# Altium PCB ATRACK_FACE_V1.PcbDoc
Units mm, origin at the board's own origin, x right, y up, seen from the top; angles counter-clockwise.
Board outline 155 x 42 mm, 2 copper layers (Top Layer, Bottom Layer); 51 components, 41 nets, 155 pads, 9 vias.
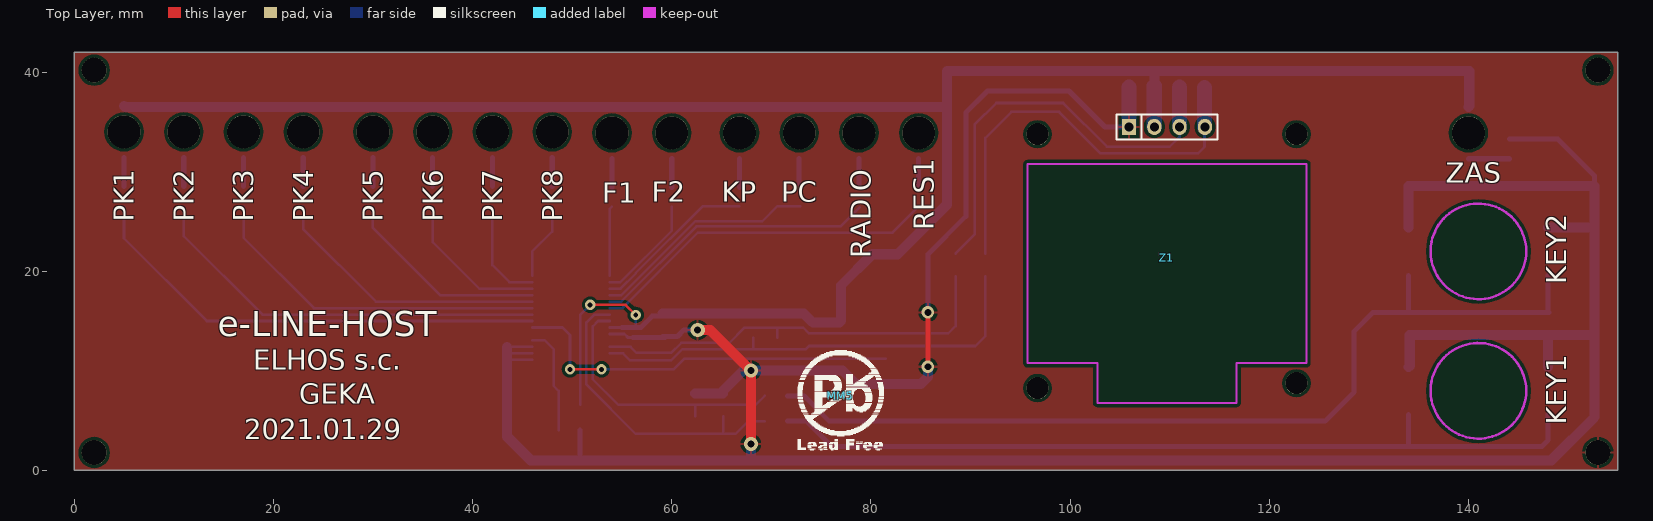
[diagram p0: Top Layer view]
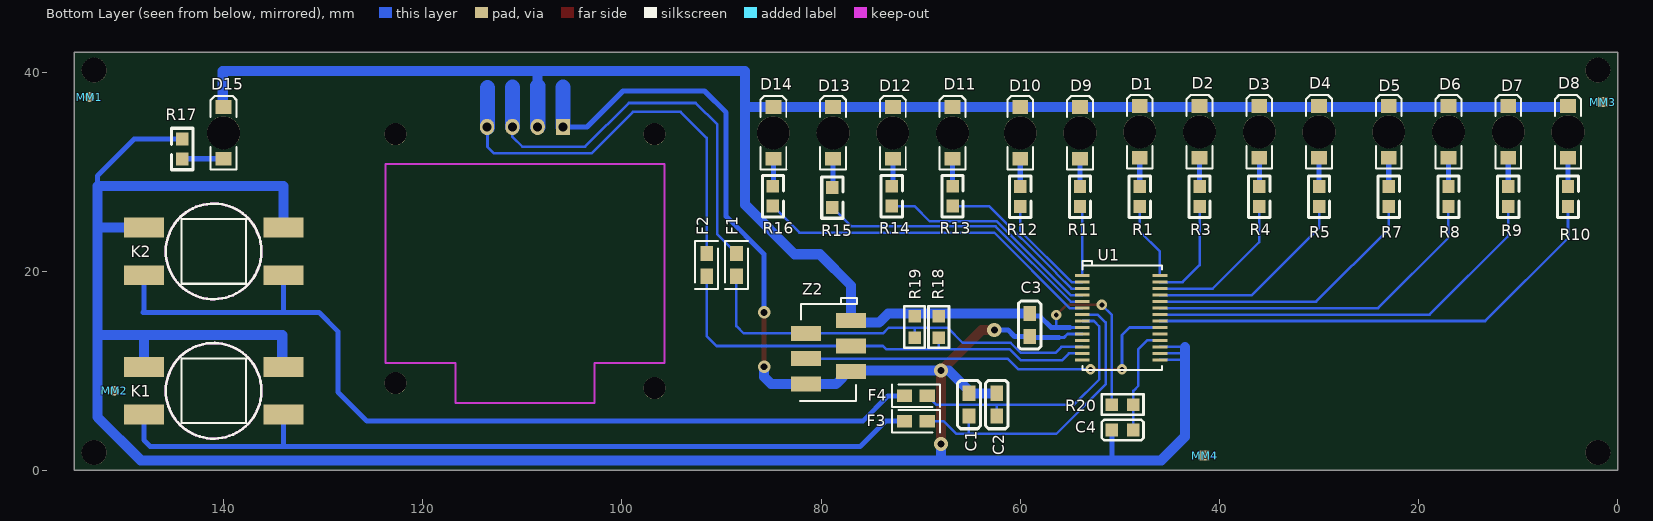
[diagram p1: Bottom Layer view, seen from below]

## Layer stack, top to bottom
Top Layer: signal copper 0.0356
Dielectric: dielectric 0.32, FR-4, Dk 4.8
Bottom Layer: signal copper 0.0356

## Board outline
0,0 0,42 155,42 155,0

## Design rules (kind name [scope] priority, off if disabled: settings)
Clearance Clearance_1 [InPolygon] p1: gap=0.305
Clearance [All] p2: gap=0.152
ComponentClearance [All] p1 off: gap=0.254 collisioncheckmode=3 verticalgap=0.254 showdistances=FALSE
HoleSize [All] p1: absolutevalues=TRUE maxlimit=5 minlimit=0.3 maxpercent=80.000 minpercent=20.000
MinimumSolderMaskSliver [All] p1: minsoldermaskwidth=0.102
PolygonConnect [All] p1: connectstyle=Relief reliefconductorwidth=0.254 reliefentries=4 polygonreliefangle="90 Angle"
RoutingVias [All] p1: holewidth=0.5 width=1.016 viastyle="Through Hole" minholewidth=0.3 minwidth=1.016 maxholewidth=2 maxwidth=5.08
SilkToSilkClearance [All] p1: silktosilkclearance=0.102
SilkscreenOverComponentPads [All] p1: minsilkscreentomaskgap=0.102
SolderMaskExpansion [All] p1: expansion=0.102
Width [All] p1: maxlimit=5.08 minlimit=0.254 preferedwidth=0.254 minimp=50.000000 maximp=50.000000 favimp=50.000000
23 further rules are at their usual default settings.

## Components (designator, comment, footprint, x,y, rotation, side; value= is the part's Value field where it differs from the comment)
C1 "10n" 0805C#1 65.151,5.461 r90 bottom
C2 "10n" 0805C#1 62.357,5.461 r90 bottom
C3 "100nF" 0805C#1 59.055,15.748 r270 bottom
C4 "100nF" 0805C#2 48.641,4.064 r0 bottom
D1 "KPTR-3216QBC-D" LED_LAMP_1 48,34 r270 bottom
D2 "KPTR-3216QBC-D" LED_LAMP_1 42,34 r270 bottom
D3 "KPTR-3216SURCK" LED_LAMP_1 36,34 r270 bottom
D4 "KPTR-3216SURCK" LED_LAMP_1 30,34 r270 bottom
D5 "KPTR-3216SURCK" LED_LAMP_1 23,34 r270 bottom
D6 "KPTR-3216SURCK" LED_LAMP_1 17,34 r270 bottom
D7 "KPTR-3216SURCK" LED_LAMP_1 11,34 r270 bottom
D8 "KPTR-3216SURCK" LED_LAMP_1 5,34 r270 bottom
D9 "KPTR-3216SURCK" LED_LAMP_1 54,33.9 r270 bottom
D10 "KPTR-3216SURCK" LED_LAMP_1 60,33.9 r270 bottom
D11 "KPTR-3216SURCK" LED_LAMP_1 66.8,33.9 r270 bottom
D12 "KPTR-3216SURCK" LED_LAMP_1 72.8,33.9 r270 bottom
D13 "KPTR-3216SURCK" LED_LAMP_1 78.8,33.9 r270 bottom
D14 "KPTR-3216SURCK" LED_LAMP_1 84.8,33.9 r270 bottom
D15 "KPTR-3216SURCK" LED_LAMP_1 140,33.9 r270 bottom
F1 "BLM18BB141SN1D" 0805L#1 88.5,19.5 r270 bottom
F2 "BLM18BB141SN1D" 0805L#1 91.5,19.5 r270 bottom
F3 "BLM18BB141SN1D" 0805L#2 71.628,4.953 r180 bottom
F4 "BLM18BB141SN1D" 0805L#2 71.628,7.493 r180 bottom
K1 "TACT-64KC" MK_DZ 141,8 r0 bottom locked
K2 "TACT-64KC" MK_DZ 141,22 r0 bottom locked
MM1 "" REF_CIR 153.5,37.5 r180 bottom
MM2 "" REF_CIR 151,8 r180 bottom
MM3 "" REF_SQR 1.5,37 r180 bottom
MM4 "" REF_SQR 41.5,1.5 r180 bottom
MM5 "" PB_FREE_GRAF 76.9,7.5 r0 top
R1 "1k" 0805R#1 48,26.375 r90 bottom
R3 "1k" 0805R#1 42,26.375 r90 bottom
R4 "1k" 0805R#1 36,26.375 r90 bottom
R5 "1k" 0805R#1 30,26.375 r90 bottom
R7 "1k" 0805R#1 23,26.375 r90 bottom
R8 "1k" 0805R#1 17,26.375 r90 bottom
R9 "1k" 0805R#1 11,26.375 r90 bottom
R10 "1k" 0805R#1 5,26.375 r90 bottom
R11 "1k" 0805R#1 54,26.375 r90 bottom
R12 "1k" 0805R#1 60,26.375 r90 bottom
R13 "1k" 0805R#1 66.802,26.418 r90 bottom
R14 "1k" 0805R#1 72.898,26.418 r90 bottom
R15 "1k" 0805R#1 78.867,26.291 r90 bottom
R16 "1k" 0805R#1 84.836,26.418 r90 bottom
R17 "1k" 0805R#1 144.145,33.399 r270 bottom
R18 "4k7" 0805R#2 68.199,15.494 r270 bottom
R19 "4k7" 0805R#2 70.612,15.494 r270 bottom
R20 "4k7" 0805R#2 50.8,6.604 r180 bottom
U1 "MCP23017-E/SS" SSOP28 53.774,19.558 r270 bottom
Z1 "WYSW" SSD1306_KW 109.73,35.77 r0 top locked
Z2 "Header 6" UMATCH-6SMD 77,15.04 r270 bottom

## Footprints (in the part's own frame and the unit in brackets; to place one, negate y for a bottom-side part, rotate by r counter-clockwise, add the part's x,y. Pads: shape width x height; smd on the part's side, far side on the other; paste and mask are expansions set on the pad)
0805C#1 [mil]
  rect 60x50 smd: 1(0,0) 2(90,0)
  silkscreen extent -50,-45 140,45
0805C#2 [mil]
  rect 50x50 smd: 1(0,0) 2(85,0)
  silkscreen extent -40,-40 125,41
0805L#1 [mil]
  rect 60x50 smd: 1(-90,0) 2(0,0)
  silkscreen extent -140,-45 50,45
0805L#2 [mil]
  rect 60x50 smd: 1(90,0) 2(0,0)
  silkscreen extent -50,-45 140,45
0805R#1 [mm]
  rect 1.3x1.25 smd: 1(0.125,0) 2(2.125,0)
  silkscreen extent -0.97,-1.07 3.2,1.07
0805R#2 [mm]
  rect 1.27x1.27 smd: 1(0,0) 2(2.159,0)
  silkscreen extent -1.02,-1.02 3.18,1.04
LED_LAMP_1 [mm]
  round 3.3 hole 3.3 unplated mask+0: 0(0,0)
  rect 1.4x1.6 smd: A(-2.6,0) K(2.6,0)
  silkscreen extent -3.7,-1.3 3.7,1.3
MK_DZ [mm]
  rect 4x2 smd: 1(-7,2.4) 2(7,2.4) 3(-7,-2.4) 4(7,-2.4)
  Keep-Out Layer circle w0.254: c0,0 r4.8
  silkscreen extent -4.8,-4.8 4.8,4.8
PB_FREE_GRAF [mm]
  silkscreen extent -4.29,-5.46 4.43,4.59
REF_CIR [mm]
  round 1 smd paste-0.5 mask+0.5: 0(0,0)
REF_SQR [mm]
  rect 1x1 smd paste-0.5 mask+0.5: ""(0,0)
SSD1306_KW [mm]
  round 2.2 hole 2.2 mask+0: 0(-13,-27.5) 0(-13,-2) 0(13,-27) 0(13,-2)
  rect 1.422x1.626 hole 0.9: 1(-3.81,-1.27)
  oval 1.422x1.626 hole 0.9: 2(-1.27,-1.27) 3(1.27,-1.27) 4(3.81,-1.27)
  silkscreen extent -5.08,-2.54 5.08,0
SSOP28 [mm]
  rect 0.3x1.5 smd: 1(0,0) 2(0.65,0) 3(1.3,0) 4(1.95,0) 5(2.6,0) 6(3.25,0) 7(3.9,0) 8(4.55,0) 9(5.2,0) 10(5.85,0) 11(6.5,0) 12(7.15,0) 13(7.8,0) 14(8.45,0) 15(8.45,7.8) 16(7.8,7.8) 17(7.15,7.8) 18(6.5,7.8) 19(5.85,7.8) 20(5.2,7.8) 21(4.55,7.8) 22(3.9,7.8) 23(3.25,7.8) 24(2.6,7.8) 25(1.95,7.8) 26(1.3,7.8) 27(0.65,7.8) 28(0,7.8)
  silkscreen extent -1.5,0 9.45,8
UMATCH-6SMD [mm]
  rect 1.5x3 smd: 1(0,0) 2(1.27,-4.5) 3(2.54,0) 4(3.81,-4.5) 5(5.08,0) 6(6.35,-4.5)
  silkscreen extent -2.3,-5.1 8.05,0.6

## Part data
C1 C2: library part CAP
C3 C4: library part CAP, "Capacitor"
D1 D2 D3 D10: library part LED
D4 D5 D6 D7 D8 D9 D11 D12 D13 D14 D15: library part LED, "KPTD-3216SGC"
F1 F2 F3 F4: library part KORALIK, "Koralik ferrytowy"
K1 K2: library part KLAW5
MM1 MM2 MM3 MM4 MM5: library part MECH
R1 R3 R4 R5 R7 R8 R9 R10 R11 R12 R13 R14 R15 R16 R17 R18 R19 R20: library part RES3
U1: library part MCP23017_SSOP28
Z1: library part CON4, "Connector"
Z2: "Micro Match 6"

## Free pads (board coordinates)
  round 2.5 hole 2.5 mask+0: 0(2,1.8) 0(2,40.2) 0(153,1.8) 0(153,40.2)

## Via types
v1: diameter 1.016, hole 0.5, Top Layer to Bottom Layer, tented both sides, 4 vias
v2: diameter 1.422, hole 0.7, Top Layer to Bottom Layer, tented both sides, 3 vias
v3: diameter 1.27, hole 0.7, Top Layer to Bottom Layer, tented both sides, 2 vias

## Nets (pads, with @x,y where several pads share a name; then routed paths per layer and width w, separated by ;. In a path a pad name is that pad's centre, name@x,y a point inside that pad or via, vN(x,y) a via of type N, cw(c..) or ccw(c..) an arc to the next point about the centre after c; other vN are vias at no path point)
GND: C1.2 C2.2 C3.2 C4.2 K1.3 K1.4 K2.3 K2.4 pad.0@153,1.8 R17.1 U1.10 U1.15 U1.16 U1.17 Z1.1 Z2.5 Z2.6 | length 322.7
  Top Layer w0.508: v3(85.725,10.414) v3(85.725,15.875)
  Top Layer w1.016: v2(62.611,14.097) 63.881,14.097 v2(67.945,10.033) v2(67.945,2.667)
  Bottom Layer w0.254: 43.218,12.065 43.472,11.811 43.525,11.758 U1.16 ; 43.472,11.176 43.54,11.108 U1.15 ; 43.472,12.408 U1.17 ; Z2.5 78.27,8.69 78.486,8.69
  Bottom Layer w0.305: U1.10 55.253,13.708 55.626,13.335 56.134,13.335
  Bottom Layer w0.508: 50.8,1.016 C4.2 ; 56.134,13.335 59.309,13.335 C3.2@59.436,13.462 ; C3.2 C3.2@59.436,13.462 ; v2(62.611,14.097) 61.214,14.097 60.579,13.462 C3.2@59.436,13.462 ; v3(85.725,15.875) 85.725,21.717 89.535,25.527 89.535,35.935 91.7,38.1 99.9,38.1 103.5,34.5 Z1.1 ; R17.1 148.971,33.274 152.654,29.591 152.654,28.575
  Bottom Layer w1.016: 43.472,12.408 43.472,11.811 43.472,11.176 43.472,3.391 45.847,1.016 50.8,1.016 67.945,1.016 ; C2.2 C1.2 65.151,8.001 67.183,10.033 v2(67.945,10.033) 77.143,10.033 78.486,8.69 Z2.6 85.017,8.69 85.725,9.398 v3(85.725,10.414) ; v2(67.945,2.667) 67.945,1.016 ; K1.3 134.112,10.512 134.112,13.589 148.082,13.589 ; K2.3 134,28.56 133.985,28.575 152.654,28.575 152.654,24.13 ; K1.4 148,13.507 148.082,13.589 ; K2.4 152.384,24.4 152.654,24.13 ; 67.945,1.016 148.316,1.016 152.654,5.354 152.654,13.589 ; 148.082,13.589 152.654,13.589 ; 152.654,13.589 152.654,24.13
  Bottom Layer w1.524: 105.918,38.481 105.92,38.479 Z1.1
K_IRQ: U1.20 Z2.4 | length 39.7
  Top Layer w0.254: v1(49.784,10.16) v1(52.959,10.16)
  Bottom Layer w0.254: U1.20 49.022,14.358 49.784,13.596 v1(49.784,10.16) ; v1(52.959,10.16) 60.198,10.16 61.268,11.23 Z2.4
K_RST: C4.1 R20.2 U1.18 | length 10.9
  Bottom Layer w0.254: U1.18 47.267,13.058 48.133,12.192 48.133,8.509 48.641,8.001 R20.2 C4.1
KEY1: C1.1 F3.1 U1.7 | length 31.2
  Bottom Layer w0.254: U1.7 52.234,15.658 51.435,14.859 51.435,8.636 56.388,3.683 65.151,3.683 ; C1.1 65.151,3.683 ; F3.1 67.691,4.953 66.421,3.683 65.151,3.683
KEY2: C2.1 F4.1 U1.8 | length 27.1
  Bottom Layer w0.254: U1.8 52.6,15.008 52.07,14.478 52.07,9.144 54.61,6.604 62.357,6.604 ; C2.1 62.357,6.604 ; F4.1 68.453,6.604 62.357,6.604
L_1: R16.1 U1.6 | length 35.3
  Bottom Layer w0.254: U1.6 55.043,16.308 62.611,23.876 82.169,23.876 R16.1
L_F1: R11.1 U1.1 | length 7
  Bottom Layer w0.254: U1.1 53.774,26.274 R11.1
L_F2: R12.1 U1.2 | length 10.8
  Bottom Layer w0.254: U1.2 54.849,18.908 60,24.059 R12.1
L_KP: R13.1 U1.3 | length 16.5
  Bottom Layer w0.254: U1.3 54.864,18.258 56.388,19.782 56.388,19.812 63.119,26.543 R13.1
L_PC: R14.1 U1.4 | length 22.8
  Bottom Layer w0.254: U1.4 54.946,17.608 62.357,25.019 69.088,25.019 70.612,26.543 R14.1
L_RAD: R15.1 U1.5 | length 29
  Bottom Layer w0.254: U1.5 54.931,16.958 62.484,24.511 76.962,24.511 R15.1
NetD1_K: D1.K R1.2 | length 2.9
  Bottom Layer w0.508: R1.2 D1.K
NetD2_K: D2.K R3.2 | length 2.9
  Bottom Layer w0.508: R3.2 D2.K
NetD3_K: D3.K R4.2 | length 2.9
  Bottom Layer w0.508: R4.2 D3.K
NetD4_K: D4.K R5.2 | length 2.9
  Bottom Layer w0.508: R5.2 D4.K
NetD5_K: D5.K R7.2 | length 2.9
  Bottom Layer w0.508: R7.2 D5.K
NetD6_K: D6.K R8.2 | length 2.9
  Bottom Layer w0.508: R8.2 D6.K
NetD7_K: D7.K R9.2 | length 2.9
  Bottom Layer w0.508: R9.2 D7.K
NetD8_K: D8.K R10.2 | length 2.9
  Bottom Layer w0.508: R10.2 D8.K
NetD9_K: D9.K R11.2 | length 2.9
  Bottom Layer w0.508: R11.2@54,28.4 D9.K
NetD10_K: D10.K R12.2 | length 2.9
  Bottom Layer w0.508: R12.2@60,28.4 D10.K
NetD11_K: D11.K R13.2 | length 2.9
  Bottom Layer w0.508: R13.2@66.8,28.4 D11.K
NetD12_K: D12.K R14.2 | length 2.9
  Bottom Layer w0.508: R14.2@72.8,28.4 D12.K
NetD13_K: D13.K R15.2 | length 2.9
  Bottom Layer w0.508: R15.2@78.8,28.4 D13.K
NetD14_K: D14.K R16.2 | length 2.9
  Bottom Layer w0.508: R16.2@84.8,28.4 D14.K
NetD15_K: D15.K R17.2 | length 4.2
  Bottom Layer w0.508: D15.K 144.119,31.3 R17.2
NetF1_1: F1.1 Z1.3 | length 42.4
  Bottom Layer w0.254: F1.1 90.424,23.71 90.424,34.724 92.6,36.9 99.3,36.9 103.688,32.512 110.012,32.512 111,33.5 Z1.3
  Bottom Layer w1.524: Z1.3 111,38.479
NetF2_1: F2.1 Z1.4 | length 42.7
  Bottom Layer w0.254: F2.1 91.5,33.4 94.1,36 98.9,36 103.023,31.877 112.877,31.877 113.5,32.5 113.5,34.46 Z1.4
  Bottom Layer w1.524: Z1.4@113.5,34.46 113.5,38.439
NetF3_2: F3.2 K1.1 K1.2 | length 83.4
  Bottom Layer w0.508: F3.2 73.533,4.953 76.073,2.413 134,2.413 ; K1.1 134,2.413 ; K1.2 148,3.048 147.365,2.413 134,2.413
NetF4_2: F4.2 K2.1 K2.2 | length 93.1
  Bottom Layer w0.508: F4.2 73.279,7.493 75.819,4.953 125.603,4.953 128.524,7.874 128.524,13.97 130.429,15.875 133.985,15.875 ; K2.1 133.985,19.585 133.985,15.875 ; K2.2 148,15.957 148.082,15.875 133.985,15.875
PK1: R10.1 U1.21 | length 47.6
  Bottom Layer w0.254: R10.1 5,23.321 13.313,15.008 U1.21
PK2: R9.1 U1.22 | length 41.2
  Bottom Layer w0.254: R9.1 11,23.544 18.886,15.658 U1.22
PK3: R8.1 U1.23 | length 35
  Bottom Layer w0.254: R8.1 17.018,26.482 17.018,23.368 24.078,16.308 U1.23
PK4: R7.1 U1.24 | length 28.3
  Bottom Layer w0.254: R7.1 22.987,26.487 22.987,24.257 30.286,16.958 U1.24
PK5: R5.1 U1.25 | length 20.9
  Bottom Layer w0.254: R5.1 29.972,26.472 29.972,24.384 36.748,17.608 U1.25
PK6: R4.1 U1.26 | length 15.5
  Bottom Layer w0.254: R4.1 36,22.928 40.67,18.258 U1.26
PK7: R3.1 U1.27 | length 10.6
  Bottom Layer w0.254: R3.1 42,20.611 43.703,18.908 U1.27
PK8: R1.1 U1.28 | length 7.8
  Bottom Layer w0.254: U1.28 45.974,21.971 48,23.997 R1.1
SCL: F1.2 R19.2 U1.12 Z2.2 | length 42.6
  Bottom Layer w0.254: U1.12 55.88,12.408 56.477,11.811 59.944,11.811 60.96,12.827 65.786,12.827 67.31,14.351 70.612,14.351 ; R19.2 70.612,14.351 ; F1.2 88.5,14.5 87.77,13.77 Z2.2 73.787,13.77 73.206,14.351 70.612,14.351
SDA: F2.2 R18.2 U1.13 Z2.3 | length 46.2
  Bottom Layer w0.254: U1.13 55.118,11.758 55.827,11.049 59.944,11.049 61.087,12.192 68.199,12.192 ; R18.2 68.199,12.192 ; F2.2 91.5,13.5 90.5,12.5 Z2.3 73.787,12.5 73.479,12.192 68.199,12.192
VC3: C3.1 D1.A D2.A D3.A D4.A D5.A D6.A D7.A D8.A D9.A D10.A D11.A D12.A D13.A D14.A D15.A R18.1 R19.1 R20.1 U1.9 Z1.2 Z2.1 | length 292.5
  Top Layer w0.254: v1(51.816,16.637) 55.372,16.637 v1(56.388,15.621)
  Bottom Layer w0.254: R20.1 50.8,15.621 v1(51.816,16.637) ; U1.9 54.991,14.358 ; 56.388,14.358 v1(56.388,15.621)
  Bottom Layer w0.508: D8.A D7.A D6.A D5.A D4.A D3.A D2.A D1.A 54,36.6 D10.A@60,36.6 ; 54.991,14.358 56.388,14.358 56.896,14.358 58.032,15.494 R18.1 R19.1 73.533,15.494 ; D10.A D11.A
  Bottom Layer w1.016: D8.A 5.1,36.5 42,36.5 D10.A D11.A D12.A D13.A D14.A 87.63,36.5 ; C3.1 73.279,15.748 73.533,15.494 74.168,14.859 76.819,14.859 Z2.1 77,18.58 80.137,21.717 82.677,21.717 87.63,26.67 87.63,36.5 ; 108.46,38.6 108.46,40.13 108.458,40.132 ; D15.A 140.081,36.581 140.081,40.132 108.458,40.132 ; 87.63,36.5 87.63,40.132 108.458,40.132
  Bottom Layer w1.524: Z1.2 108.46,38.6
pads on no net: D1.0 D2.0 D3.0 D4.0 D5.0 D6.0 D7.0 D8.0 D9.0 D10.0 D11.0 D12.0 D13.0 D14.0 D15.0 MM1.0 MM2.0 MM3. MM4. U1.11 U1.14 U1.19 Z1.0

## Polygon pours and split planes (outlines as drawn)
GND on Top Layer "F1" (solid, remove dead copper, pour order 2): 0,0 0,42 155,42 155,0

## Keep-outs
Keep-Out Layer:
  lines w0.2: 95.73,10.77 95.73,30.77 123.73,30.77 123.73,10.77 116.73,10.77 116.73,6.77 102.73,6.77 102.73,10.77 95.73,10.77

## Silkscreen, mask and mechanical layers (free items; w line width, h text height)
Top Overlay:
  text "ZAS" at 137.7,28.9 h2.03
  text "F2" at 58,27 h2.03
  text "KP" at 65,27 h2.03
  text "PC" at 71,27 h2.03
  text "F1" at 53,26.9 h2.03
  text "PK1" at 6,25 h2.03 r90
  text "PK2" at 12,25 h2.03 r90
  text "PK3" at 18,25 h2.03 r90
  text "PK4" at 24,25 h2.03 r90
  text "PK5" at 31,25 h2.03 r90
  text "PK6" at 37,25 h2.03 r90
  text "PK7" at 43,25 h2.03 r90
  text "PK8" at 49,25 h2.03 r90
  text "RES1" at 86.3,24.1 h2.03 r90
  text "RADIO" at 80,21.3 h2.03 r90
  text "KEY2" at 149.8,18.7 h2.03 r90
  text "e-LINE-HOST" at 14.4,13.5 h2.54
  text "ELHOS s.c." at 18,10.1 h2.03
  text "GEKA" at 22.6,6.7 h2.03
  text "KEY1" at 149.8,4.6 h2.03 r90
  text "2021.01.29" at 17.069,3.154 h2.03
Bottom Solder:
  rectangle: 104.775,35.687 114.935,39.37
Mechanical 1:
  the board outline again, w0.2
Mechanical 2:
  lines w0.2: 2,4 cw(c2,2) 4,2 24.5,2 24.5,40 4,40 cw(c2,40) 2,38 2,4 ; 28.5,2 47.5,2 47.5,3 55.5,3 55.5,2 59.437,2 61.5,2 61.5,40 55.5,40 55.5,39 47.5,39 47.5,40 36.75,40 28.5,40 28.5,2 ; 65.5,2 89.5,2 89.5,40 65.5,40 65.5,2 ; 93.5,2 99.5,2 99.5,3 107.5,3 107.5,2 126.5,2 126.5,40 118.25,40 114.125,40 107.5,40 107.5,39 99.5,39 99.5,40 93.5,40 93.5,2 ; 130.5,2 151,2 cw(c153,2) 153,4 153,38 cw(c153,40) 151,40 130.5,40 130.5,2